# Altium PCB Copy of Audio_receiver.PcbDoc
Units mil, origin at the board's own origin, x right, y up, seen from the top; angles counter-clockwise.
Board outline 6000 x 4000 mil, 2 copper layers (TOP, Bottom), stack 12.8 mil thick; 50 components, 30 nets, 153 pads, 17 vias.
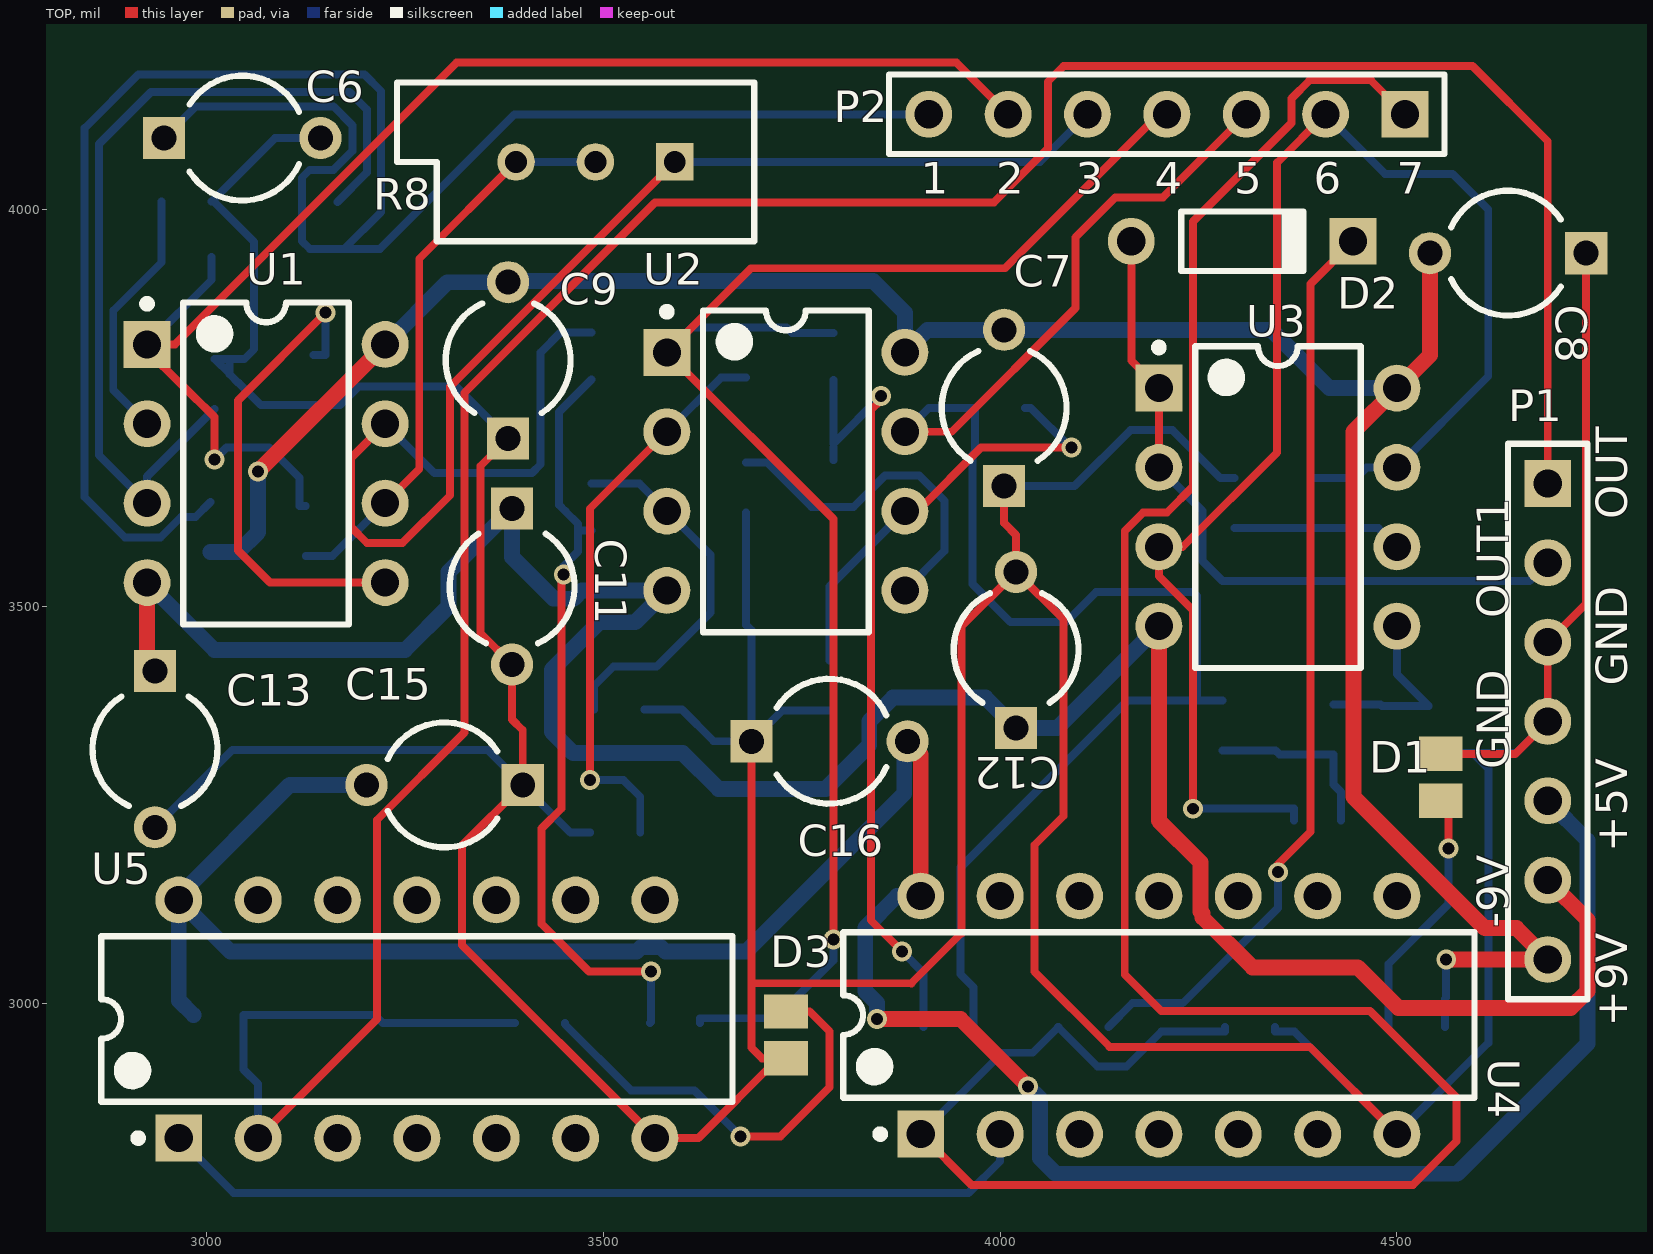
[diagram p0: TOP view]
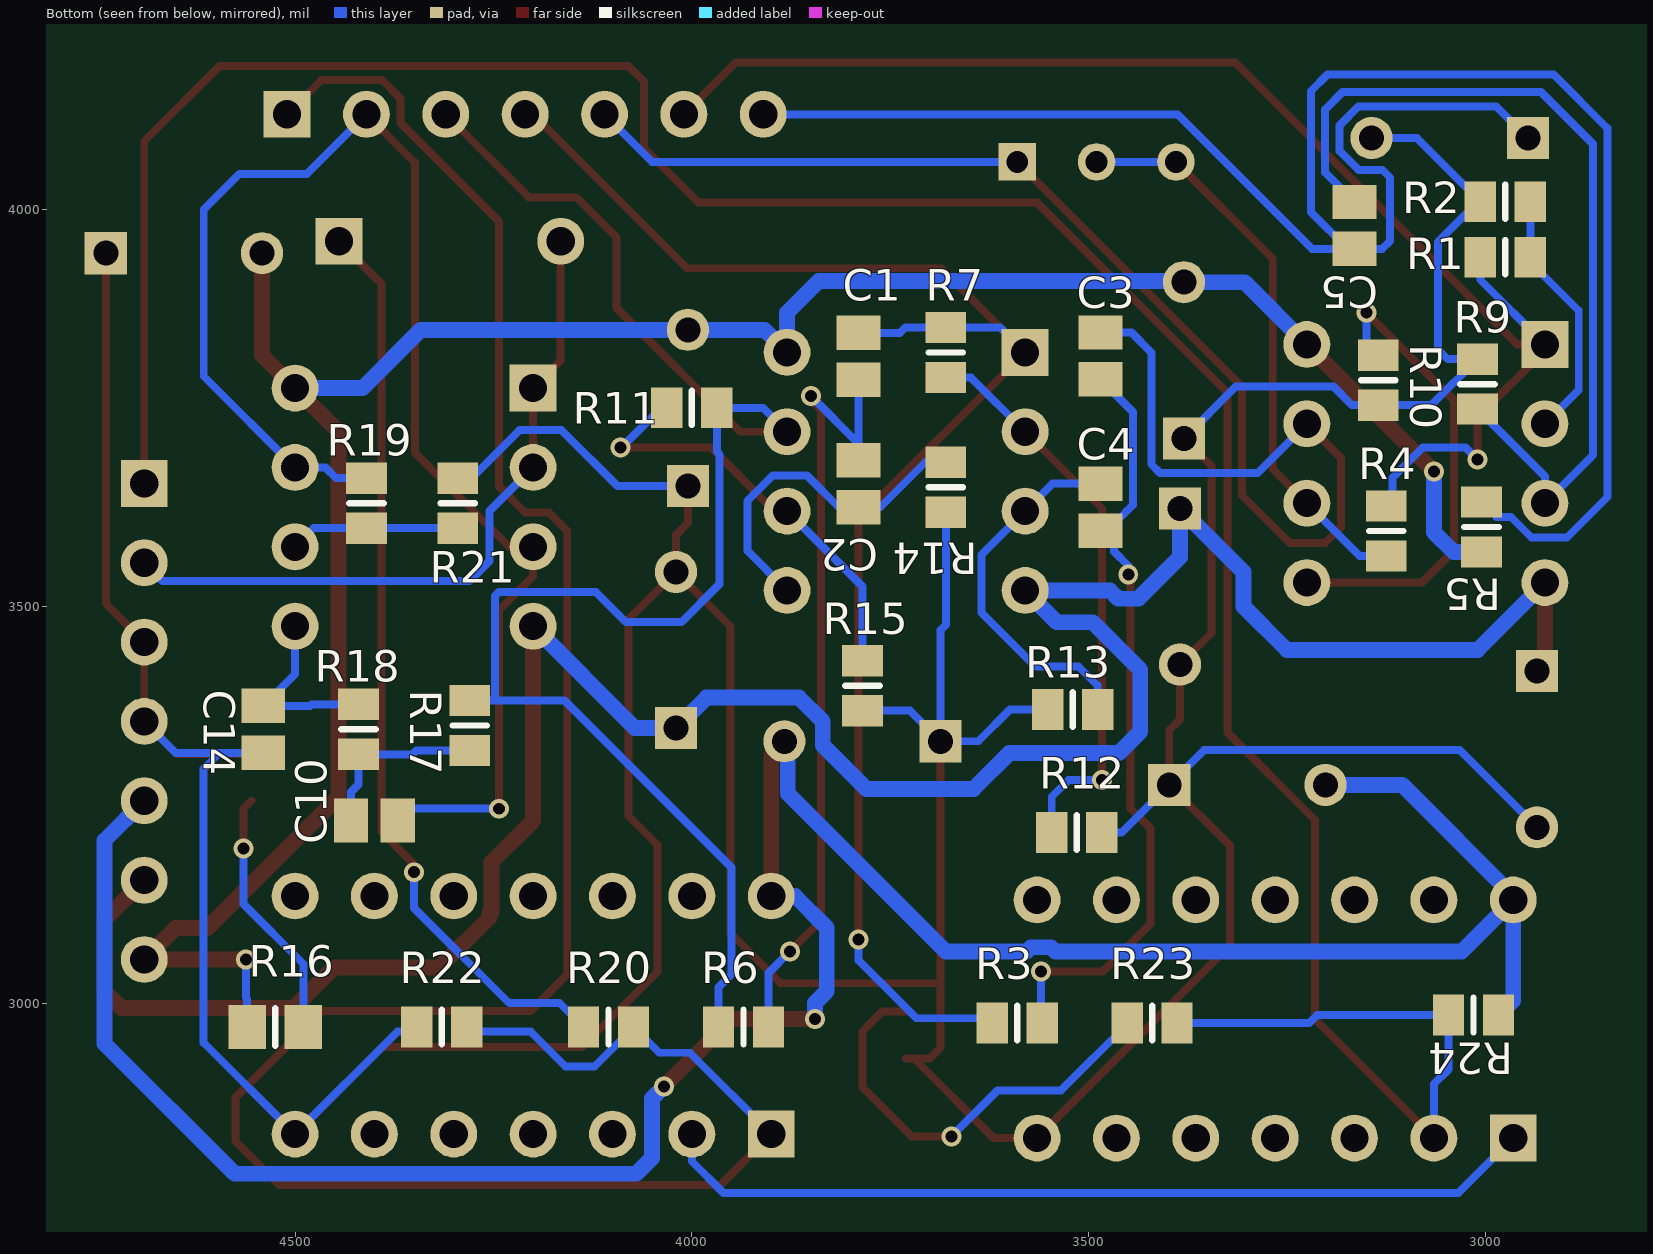
[diagram p1: Bottom view, seen from below]

## Layer stack, top to bottom
Top Solder: solder mask 0.4, Solder Resist, Dk 3.5
TOP: signal copper 1.4
Dielectric 1: core 10, FR-4, Dk 4.2
Bottom: signal copper 1.4
Solder Side: solder mask 0.4, Solder Resist, Dk 3.5

## Board outline
1000,1000 7000,1000 7000,5000 1000,5000

## Design rules (kind name [scope] priority, off if disabled: settings)
Clearance [All] p1: gap=8 ignorepadtopadclearanceinfootprint=FALSE except(0: Arc-Hole Track-Hole SMDPad-Hole THPad-Hole Via-Hole Fill-Hole Poly-Hole Region-Hole Text-Hole)
PolygonConnect [All] p1: connectstyle=Relief reliefconductorwidth=10 reliefentries=4 polygonreliefangle="90 Angle" airgapwidth=10
RoutingVias [All] p1: holewidth=15 width=25 viastyle="Through Hole" minholewidth=15 minwidth=25 maxholewidth=15 maxwidth=25
SilkToSilkClearance [All] p1: silktosilkclearance=0
SilkToSolderMaskClearance [IsPad] p1: minsilkscreentomaskgap=0 clearancetoexposedcopper=TRUE
SolderMaskExpansion [All] p1: expansion=4
Width [All] p1: maxlimit=20 minlimit=10 preferedwidth=10 minimp=50.000000 maximp=50.000000 favimp=50.000000
28 further rules are at their usual default settings.

## Components (designator, comment, footprint, x,y, rotation, side; value= is the part's Value field where it differs from the comment)
C1 "Cap" C0805 3790,3815 r270 bottom value=0.01uf
C2 "Cap" C0805 3790,3654.53 r270 bottom value=0.01uf
C3 "Cap" C0805 3485,3815.47 r270 bottom value=0.01uf
C4 "Cap" C0805 3485,3625 r90 bottom value=0.01uf
C5 "Cap" C0805 3165,3980 r90 bottom value=0.1uf
C6 "Cap Pol1" CAPR5-4X5 3045,4090 r0 top value=100pF
C7 "Cap" CAPR5-4X5 4005,3750 r90 top value=47uf
C8 "Cap" CAPR5-4X5 4640,3945 r180 top value=47uf
C9 "Cap" CAPR5-4X5 3380,3810 r90 top value=47uf
C10 "Cap" C0805 4400,3230 r180 bottom value=0.01uf
C11 "Cap" CAPR5-4X5 3385,3525 r270 top value=47uf
C12 "Cap" CAPR5-4X5 4020,3445 r90 top value=47uf
C13 "Cap" CAPR5-4X5 2935,3320 r270 top value=47uf
C14 "Cap" C0805 4540,3345 r90 bottom value=0.01uf
C15 "Cap" CAPR5-4X5 3300,3275 r180 top value=47uf
C16 "Cap" CAPR5-4X5 3785,3330 r0 top value=47uf
D1 "LED3" C0805 4555,3284.53 r90 top
D2 "1N4007" DO-35 4305,3960 r0 top
D3 "LED3" C0805 3730,2960 r270 top
P1 "Header 7" HDR1X7 4690,3655 r270 top
P2 "Header 7" HDR1X7 4510,4120 r180 top
R1 "Res1" 6-0805_L 2975,3940 r180 bottom value=100K
R2 "Res1" 6-0805_L 2975,4010 r0 bottom value=1K
R3 "Res1" 6-0805_L 3590,2975 r180 bottom value=5K1
R4 "Res1" 6-0805_L 3125,3595 r90 bottom value=1K
R5 "Res1" 6-0805_L 3005,3600 r270 bottom value=3K3
R6 "Res1" 6-0805_L 3935,2970 r0 bottom value=5K1
R7 "Res1" 6-0805_L 3680,3820 r270 bottom value=6K8
R8 "RPot" VR5 3490,4060 r180 top value=20K
R9 "Res1" 6-0805_L 3010,3780 r270 bottom value=10K
R10 "Res1" 6-0805_L 3135,3785 r90 bottom value=1K
R11 "Res1" 6-0805_L 4000,3750 r180 bottom value=6K8
R12 "Res1" 6-0805_L 3515,3215 r180 bottom value=5K1
R13 "Res1" 6-0805_L 3520,3370 r0 bottom value=5K1
R14 "Res1" 6-0805_L 3680,3650 r270 bottom value=5K1
R15 "Res1" 6-0805_L 3785,3400 r270 bottom value=5K1
R16 "Res1" 6-0805_N 4525,2970 r0 bottom value=1K
R17 "Res1" 6-0805_L 4280,3350 r90 bottom value=3K3
R18 "Res1" 6-0805_L 4420,3345 r270 bottom value=3K3
R19 "Res1" 6-0805_L 4410,3630 r270 bottom value=6K8
R20 "Res1" 6-0805_L 4105,2970 r0 bottom value=100
R21 "Res1" 6-0805_L 4295,3630 r270 bottom value=3K3
R22 "Res1" 6-0805_L 4315,2970 r0 bottom value=200
R23 "Res1" 6-0805_L 3420,2975 r180 bottom value=1K
R24 "Res1" 6-0805_L 3015,2985 r0 bottom value=10K
U1 "NE5532" DIP-8 3075,3680 r0 top
U2 "NE5532" DIP-8 3730,3670 r0 top
U3 "NE5532" DIP-8 4350,3625 r0 top
U4 "74HC14" DIP-14 4200,2985 r90 top
U5 "74HC04" DIP-14 3265,2980 r90 top

## Footprints (in the part's own frame and the unit in brackets; to place one, negate y for a bottom-side part, rotate by r counter-clockwise, add the part's x,y. Pads: shape width x height; smd on the part's side, far side on the other; paste and mask are expansions set on the pad)
6-0805_L [mm] "Chip Resistor, Body 2.0x1.2mm, IPC High Density"
  rect 1x1.3 smd: 1(-0.8,0) 2(0.8,0)
  silkscreen extent 0,-0.55 0,0.55, body extent -1.07,-0.7 1.07,0.7, height 0.7
6-0805_N [mm] "Chip Resistor, Body 2.0x1.2mm, IPC Medium Density"
  rect 1.2x1.4 smd: 1(-0.9,0) 2(0.9,0)
  silkscreen extent 0,-0.6 0,0.6, body extent -1.07,-0.7 1.07,0.7, height 0.7
C0805 [mm] "Chip Capacitor, Body 2.0x1.3mm, IPC High Density"
  rect 1.1x1.4 smd: 1(-0.75,0) 2(0.75,0)
  body extent -1.1,-0.72 1.1,0.72, height 1.4
CAPR5-4X5 [mm] "Capacitor; 2 Leads"
  rect 1.35x1.35 hole 0.8: 1(-2.5,0)
  round 1.35 hole 0.8: 2(2.5,0)
  silkscreen extent -1.69,-2 1.82,2
DIP-8 [mm] "DIP; 8 Leads; Row Spacing 7.62 mm; Pitch 2.54 mm"
  rect 1.5x1.5 hole 0.9: 1(-3.81,3.81)
  round 1.5 hole 0.9: 2(-3.81,1.27) 3(-3.81,-1.27) 4(-3.81,-3.81) 5(3.81,-3.81) 6(3.81,-1.27) 7(3.81,1.27) 8(3.81,3.81)
  silkscreen extent -3.93,-5.15 2.65,5.23, body extent -3.6,-5.15 3.6,5.15, height 5.08
DIP-14 [mm] "DIP; 14 Leads; Row Spacing 7.62 mm; Pitch 2.54 mm"
  rect 1.5x1.5 hole 0.9: 1(-3.81,7.62)
  round 1.5 hole 0.9: 2(-3.81,5.08) 3(-3.81,2.54) 4(-3.81,0) 5(-3.81,-2.54) 6(-3.81,-5.08) 7(-3.81,-7.62) 8(3.81,-7.62) 9(3.81,-5.08) 10(3.81,-2.54) 11(3.81,0) 12(3.81,2.54) 13(3.81,5.08) 14(3.81,7.62)
  silkscreen extent -3.93,-10.1 2.65,10.1, body extent -3.6,-10.1 3.6,10.1, height 5.08
DO-35 [mm] "Diode, Axial; Body 3.8 x 1.9 mm (LxDia. max), Lead Dia. 0.53 mm (max)"
  round 1.5 hole 0.9: 1(-3.55,0)
  rect 1.5x1.5 hole 0.9: 2(3.55,0)
  silkscreen extent -1.95,-0.95 2.05,0.95
HDR1X7 [mm] "Connector; Header; 7 Position"
  rect 1.5x1.5 hole 0.9: 1(0,0)
  round 1.5 hole 0.9: 2(2.54,0) 3(5.08,0) 4(7.62,0) 5(10.16,0) 6(12.7,0) 7(15.24,0)
  silkscreen extent -1.27,-1.27 16.51,1.27
VR5 [mm] "Thru-Hole; 3 Leads"
  rect 1.2x1.2 hole 0.7: 1(-2.54,0)
  round 1.2 hole 0.7: 2(0,0) 3(2.54,0)
  silkscreen extent -5.08,-2.54 6.35,2.54

## Part data
C1 C2 C3 C4 C5 C7 C8 C9 C10 C11 C12 C13 C14 C15 C16: "Capacitor", LatestRevisionDate=17-Jul-2002, LatestRevisionNote="Re-released for DXP Platform.", PackageDescription="Radial Cap, Thru-Hole; 2 Leads; 0.3 in Pin Spacing", PackageReference=RAD-0.3, Published=8-Jun-2000, Publisher="Altium Limited"
C6: "Polarized Capacitor (Radial)", LatestRevisionDate=17-Jul-2002, LatestRevisionNote="Re-released for DXP Platform.", PackageDescription="Polarized Capacitor (Radial); 2 Leads", PackageReference=RB7.6-15, Published=8-Jun-2000, Publisher="Altium Limited"
D1 D3: "Typical BLUE SiC LED", DatasheetVersion=16-Apr-2002, LatestRevisionDate=17-Dec-2003, LatestRevisionNote="PCB Footprint replaced.", PackageDescription="SM LED; 2 C-Bend Leads; Body 3.5 x 2.8 x 1.9 mm, inc leads (LxWxH typ)", PackageReference=3.5X2.8X1.9, PackageVersion=16-Apr-2002, Published=8-Jun-2000, Publisher="Altium Limited"
D2: library part Diode, "Default Diode", Code_JEDEC=DO-214-AB, LatestRevisionDate=17-Jul-2002, LatestRevisionNote="Re-released for DXP Platform.", PackageDescription="DO-214-AB/SMC; 2 C-Bend Leads; Body 7.9 x 5.9 mm, inc. leads (LxW)", PackageReference=SMC, PackageVersion=Sep-1996, Published=8-Jun-2000, Publisher="Altium Limited"
P1 P2: "Header, 7-Pin", LatestRevisionDate=17-Jul-2002, LatestRevisionNote="Re-released for DXP Platform.", Publisher="Altium Limited"
R1 R2 R3 R4 R5 R6 R7 R9 R10 R11 R12 R13 R14 R15 R16 R17 R18 R19 R20 R21 R22 R23 R24: "Resistor", LatestRevisionDate=17-Jul-2002, LatestRevisionNote="Re-released for DXP Platform.", PackageDescription="Axial Device, Thru-Hole; 2 Leads; 0.3 in Pin Spacing", PackageReference=AXIAL-0.3, Published=8-Jun-2000, Publisher="Altium Limited"
R8: "Potentiometer", LatestRevisionDate=17-Jul-2002, LatestRevisionNote="Re-released for DXP Platform.", PackageDescription="Variable Resistor, Thru-Hole; 3 Leads", PackageReference=VR5, Published=8-Jun-2000, Publisher="Altium Limited", Set Position=0.5, Sim Note="Enter the Resistance value and the set point into parameter fields."

## Via types
v1: diameter 25, hole 15, TOP to Bottom, 17 vias

## Nets (pads, with @x,y where several pads share a name; then routed paths per layer and width w, separated by ;. In a path a pad name is that pad's centre, name@x,y a point inside that pad or via, vN(x,y) a via of type N, cw(c..) or ccw(c..) an arc to the next point about the centre after c; other vN are vias at no path point)
+5V: C15.2 C16.2 P1.5 R24.1 U4.14 U5.14 | length 3366
  TOP w20: v1(3845,2980) 3950,2980 v1(4035,2895) ; C16.2 3900,3313.43 U4.14
  Bottom w20: R24.1 2965,3003.5 U5.14 ; C15.2 3105,3275 2965,3135 U5.14 ; v1(3845,2980) 3845,3000 3830,3015 3830,3095 3870,3135 U4.14 ; C16.2@3879.21,3325.79 3879.21,3264.21 3680,3065 3578.13,3065 3572.63,3070.5 3547.37,3070.5 3541.87,3065 3030,3065 U5.14 ; v1(4035,2895) 4050,2880 4050,2805 4070,2785 4576,2785 4740,2949 4740,3205 P1.5
+9V: C7.2 C8.2 C9.2 P1.7 R5.2 R16.2 U1.8 U2.8 U3.8 | length 3058.6
  TOP w20: v1(3065,3670) U1.8 ; C8.2 4541.57,3816.57 U3.8 4445,3720 4445,3260 4610.53,3094.47 4650.53,3094.47 P1.7 v1(4562,3055)
  Bottom w10: C9.2 C9.2@3381.57,3910 ; R16.2 4560.43,3005.43 4562,3007 v1(4562,3055)
  Bottom w20: R5.2 3040,3568.5 3065,3593.5 v1(3065,3670) ; U1.8 3303.43,3908.43 C9.2 ; C9.2@3381.57,3910 3840,3910 3880,3870 U2.8 3908.43,3848.43 C7.2 4341.57,3848.43 4415,3775 U3.8
-9V: C11.1 C12.1 C13.1 P1.6 U1.4 U2.4 U3.4 | length 3277.8
  TOP w20: U1.4 2925,3428.43 C13.1 ; U3.4 4200,3230 4252.47,3177.53 4252.47,3115.31 4255,3112.79 4255,3108 4318,3045 4450.63,3045 4501.63,2994 4719,2994 4740,3015 4740,3105 P1.6
  Bottom w20: U1.4 3010,3445 3250,3445 3305,3500 3305,3543.43 C11.1 3385,3561.87 3437.37,3509.5 3462.63,3509.5 3473.13,3520 U2.4 3540,3480 3495,3480 3435,3420 3435,3342 3462,3315 3600,3315 3645,3270 3780,3270 3835,3325 3835,3355 3865,3385 3981.57,3385 C12.1 4071.57,3346.57 U3.4
FIVE: P2.3 R6.2 R11.2 R17.2 U2.7 | length 2049.4
  TOP w10: U2.7 3939,3720 4095,3876 4095,3965 4145,4015 4205,4015 P2.3
  Bottom w10: U2.7 3910,3750 R11.2 3968.5,3695 3965,3691.5 3965,3528 4013,3480 4083,3480 4121,3518 4243,3518 4248,3513 4248,3381.5 ; R6.2 3966.5,3020 3950,3036.5 3950,3171 4160.5,3381.5 4248,3381.5 ; R17.2 4248,3381.5
FOUR: C1.1 P2.4 R3.1 R7.1 U2.1 | length 2037.9
  TOP w10: v1(3790,3080) 3790,3610 U2.1 3686,3926 4006,3926 4200,4120 P2.4
  Bottom w10: U2.1 3611.5,3851.5 R7.1 3731,3851.5 3737.97,3844.53 C1.1 ; R3.1 3621.5,2981 3717,2981 3790,3054 v1(3790,3080)
GND: C6.2 C7.1 C8.1 C9.1 C11.2 C12.2 C13.2 C14.1 C15.1 C16.1 D1.2 D3.2 P1.3 P1.4 R2.2 R9.1 R10.1 R12.2 R13.2 R14.2 R15.2 R21.1 R22.2 U4.7 U5.7 | length 7751.5
  TOP w10: C9.1 3345,3676.57 3345,3466.57 C11.2 3385,3357.43 3398.43,3344 C15.1 3322,3198.57 3322,3073 U5.7 3620,2830 D3.2@3720.47,2930.47 ; C16.1 3686.57,3025.43 ; D3.2 D3.2@3720.47,2930.47 ; C7.1 4005,3605 4020,3590 C12.2 ; U4.7 4390,2945 4138,2945 4043,3040 4043,3199 4080,3236 4080,3483.43 C12.2 ; D1.2 4649.06,3314.06 P1.4 P1.3 4738.43,3503.43 C8.1 ; 3686.57,3025.43 3686.57,2943.9 3700,2930.47 D3.2@3720.47,2930.47 ; 3686.57,3025.43 3888,3025 3951,3088 3951,3474.43 C12.2
  Bottom w10: C13.2 3032.43,3319 3354.43,3319 C15.1 3458.43,3215 R12.2 ; R9.1 R9.1@3010.67,3811.5 ; 3040.31,3781.19 3029.08,3792.41 R9.1@3029.08,3793.08 ; 3040.98,3781.19 3068.66,3753.5 R10.1 3168,3753.5 3191.5,3777 3314.57,3777 C9.1 ; C6.2 3086.5,4090 R2.2 3009,4010 3060,3959 3060,3824 3047.5,3811.5 R9.1@3029.08,3811.5 ; R13.2 3599,3370 3639,3330 C16.1 ; R14.2 3680,3476.57 3686.57,3470 C16.1 ; R15.2 3725.08,3368.5 C16.1 ; C7.1 4093.72,3651.57 4164.15,3722 4217,3722 4277.5,3661.5 R21.1 ; R22.2 4346.5,2964 4371,2964 U4.7 4615.06,2950.06 4615.06,3295.41 4595,3315.47 ; C14.1 4595,3315.47 ; P1.4 4650.47,3315.47 4595,3315.47 ; R9.1@3010.67,3811.5 R9.1@3029.08,3793.08 ; R9.1@3010.67,3811.5 R9.1@3029.08,3811.5 ; R9.1@3029.08,3793.08 R9.1@3029.08,3811.5
NetC1_2: C1.2 C2.1 R6.1 | length 1009.2
  TOP w10: v1(3850,3765) 3850,3760 3837,3747 3837,3104.5 v1(3876.5,3065)
  Bottom w10: C2.1 C2.1@3790,3700 ; C1.2 3790,3705 v1(3850,3765) ; v1(3876.5,3065) 3903.5,3038 R6.1
NetC2_2: C2.2 R14.1 U2.5 | length 436.9
  Bottom w10: R14.1 3706,3681.5 3762.5,3625 C2.2 3815,3625 3855,3665 3898,3665 3930,3633 3930,3570 U2.5
NetC3_2: C3.2 C4.1 R3.2 | length 976.2
  TOP w10: v1@3447,3540 3447,3245 3422,3220 3422,3100 3482,3040 v1(3560,3040)
  Bottom w10: v1(3450,3540) 3450,3551 3468,3569 C4.1@3468,3595.47 ; 3452.06,3619.87 3444,3627.93 3444,3744.94 C3.2 ; 3452.1,3619.87 3468,3603.97 C4.1@3468,3595.47 ; C4.1 C4.1@3468,3595.47 ; R3.2 3560,2976.5 v1(3560,3040)
NetC4_2: C4.2 R13.1 U2.3 | length 474.7
  Bottom w10: C4.2 3545.47,3654.53 U2.3 3635,3565 3635,3492 3567,3424 3512.5,3424 3488.5,3400 R13.1
NetC5_2: C5.2 R9.2 U1.3 | length 1128.9
  Bottom w10: U1.3 2864.47,3690.53 2864.47,4082.47 2930,4148 3180,4148 3202,4126 3202,4046.53 C5.2 ; U1.3@2938.5,3643.5 2925,3657 2925,3663.5 R9.2
NetC10_1: C10.1 R17.1 R18.2 | length 229.5
  Bottom w10: R17.1 4347,3318.5 4352,3313.5 R18.2 4420,3275.53 4429.53,3266 C10.1
NetC14_2: C14.2 R18.1 U3.5 | length 237.9
  Bottom w10: R18.1 4479,3376.5 4480.97,3374.53 C14.2 4500,3414.53 U3.5
NetD1_1: D1.1 R16.1 | length 320.4
  TOP w10: D1.1 4565,3245 v1(4565,3195)
  Bottom w10: R16.1 4489.57,3049.57 4565,3125 v1(4565,3195)
NetD2_2: D2.2 R20.2 | length 1154.9
  TOP w10: v1(4350,3165) 4350,3175 4391,3216 4391,3906.24 D2.2
  Bottom w10: R20.2 4166.5,3000 4230,3000 4350,3120 v1(4350,3165)
NetD3_1: D3.1 R23.1 | length 555.2
  TOP w10: v1(3673,2832) 3723,2832 3785,2894 3785,2964.53 3760,2989.53 D3.1
  Bottom w10: R23.1 3451.5,2973.5 3535,2890 3615,2890 v1(3673,2832)
NetR1_2: R1.2 R2.1 U1.2 | length 322.9
  Bottom w10: U1.2 2882.47,3772.53 2882.47,3872.53 2943.5,3933.56 R1.2 R2.1
NetR4_1: R4.1 R8.2 R8.3 U1.6 | length 725.9
  TOP w10: U1.6 3268,3673 3268,3938 R8.3
  Bottom w10: R4.1 3158.5,3563.5 U1.6 ; R8.3 R8.2
NetR7_2: R7.2 R12.1 U2.2 | length 724.7
  TOP w10: v1(3483,3281) 3483,3623 U2.2
  Bottom w10: v1(3483,3281) 3525.5,3281 3546.5,3260 R12.1 ; U2.2 3648.5,3788.5 R7.2
NetR10_2: R10.2 U1.5 | length 616.1
  TOP w10: v1(3150,3870) 3039.5,3759.5 3039.5,3570.5 3080,3530 U1.5
  Bottom w10: R10.2 3150,3816.5 v1(3150,3870)
NetR11_1: R11.1 R15.1 U2.6 | length 550.2
  TOP w10: U2.6 3896,3620 3976,3700 v1(4090,3700)
  Bottom w10: R15.1 3785,3525 U2.6 ; R11.1 4038.5,3750 4088.5,3700 v1(4090,3700)
NetR19_2: R19.2 R21.2 U3.6 | length 214.7
  Bottom w10: R21.2 R19.2 4476.5,3598.5 U3.6
NetU4_2: U4.2 U5.1 | length 1114.5
  Bottom w10: U5.1 3034.22,2760.78 3960,2760.78 4000,2800.78 U4.2
ONE: C5.1 C6.1 P2.7 R5.1 | length 2608.7
  Bottom w10: C6.1 2986.57,4130 3160,4130 3184,4106 3184,4074 3160,4050 3130,4050 3120,4040 3120,3960.47 3130,3950.47 C5.1 C5.1@3173.54,3950.47 ; R5.1 2985.89,3612.38 2967.53,3612.38 2942.14,3587 2897,3587 2846.47,3637.53 2846.47,4102.47 2914,4170 3199,4170 3220,4149 3220,3996.93 C5.1@3173.54,3950.47 ; P2.7 3388,4120 3218.47,3950.47 C5.1@3173.54,3950.47
OUT1: D2.1 P1.2 U3.1 U3.2 | length 895.1
  TOP w10: D2.1 4165.24,3809.76 U3.1 U3.2
  Bottom w10: U3.2 4255,3620 4255,3557 4280,3532 4667,3532 P1.2
OUTPUT: P1.1 R23.2 R24.2 U5.2 | length 3610.7
  TOP w10: U5.2 3215,2980 3215,3231 3325,3341 3325,3769 3565,4009 3992,4009 4060,4077 4060,4161 4080,4181 4595,4181 4690,4086 P1.1
  Bottom w10: U5.2 3065,2898 3046.5,2916.5 R24.2 3212,2985 3222,2975 R23.2
SEVEN: P2.1 R20.1 R22.1 U4.1 | length 3126.1
  TOP w10: U4.1 3964,2771 4520,2771 4575,2826 4575,2881 4466,2990 4203,2990 4157,3036 4157,3595 4180,3618 4210,3618 4243,3651 4243,3985 4367,4109 4367,4140 4390,4163 4467,4163 P2.1
  Bottom w10: U4.1 4002.5,2937.5 4041.01,2937.5 R20.1@4073.17,2969.67 ; R22.1 4283.5,2964 4203,2964 4159,2920 4122.84,2920 R20.1@4073.17,2969.67 ; R20.1@4073.17,2969.67 4072.84,2970 R20.1 R20.1@4073.17,2969.67
SiX: C10.2 P2.2 R19.1 U3.3 U3.7 | length 1874.8
  TOP w10: v1(4243,3245) 4243,3495 4200,3538 U3.3 4230,3575 4349,3694 4349,4059 P2.2
  Bottom w10: v1(4243,3245) 4370.47,3245 C10.2 ; R19.1@4398,3661.5 R19.1 4448,3661.5 4461.5,3675 U3.7 4615,3790 4615,4000 4570,4045 4485,4045 P2.2
THREE: C3.1 P2.5 R8.1 U1.7 | length 1829.6
  TOP w10: U1.7 3182,3687 3182,3600 3202,3580 3247,3580 3307,3640 3307,3777 R8.1
  Bottom w10: U1.7 3287,3668 3410,3668 3421,3679 3421,3820 3446,3845 C3.1 ; R8.1 4050,4060 P2.5
TWO: P2.6 R1.1 R4.2 U1.1 | length 1755.8
  TOP w10: v1(3010,3685) 3010,3738.62 2925.07,3822 U1.1 2960,3830 3315,4185 3945,4185 P2.6
  Bottom w10: U1.1 3006.5,3911.5 R1.1 ; v1(3010,3685) 3025,3700 3079,3700 3117,3662 3117,3626.5 R4.2
pads on no net: U4.3 U4.4 U4.5 U4.6 U4.8 U4.9 U4.10 U4.11 U4.12 U4.13 U5.3 U5.4 U5.5 U5.6 U5.8 U5.9 U5.10 U5.11 U5.12 U5.13

## Silkscreen, mask and mechanical layers (free items; w line width, h text height)
Top Overlay:
  text "1" at 3900,4020 h40
  text "2" at 3995,4020 h40
  text "3" at 4095,4020 h40
  text "4" at 4195,4020 h40
  text "5" at 4295,4020 h40
  text "6" at 4395,4020 h40
  text "7" at 4500,4020 h40
  text "OUT" at 4790,3610 h40 r90
  text "OUT1" at 4640,3485 h40 r90
  text "GND" at 4790,3400 h40 r90
  text "GND" at 4640,3295 h40 r90
  text "+5V" at 4790,3190 h40 r90
  text "-9V" at 4640,3095 h40 r90
  text "+9V" at 4790,2970 h40 r90